# EAGLE board Panelized-1 (EAGLE 5.10)
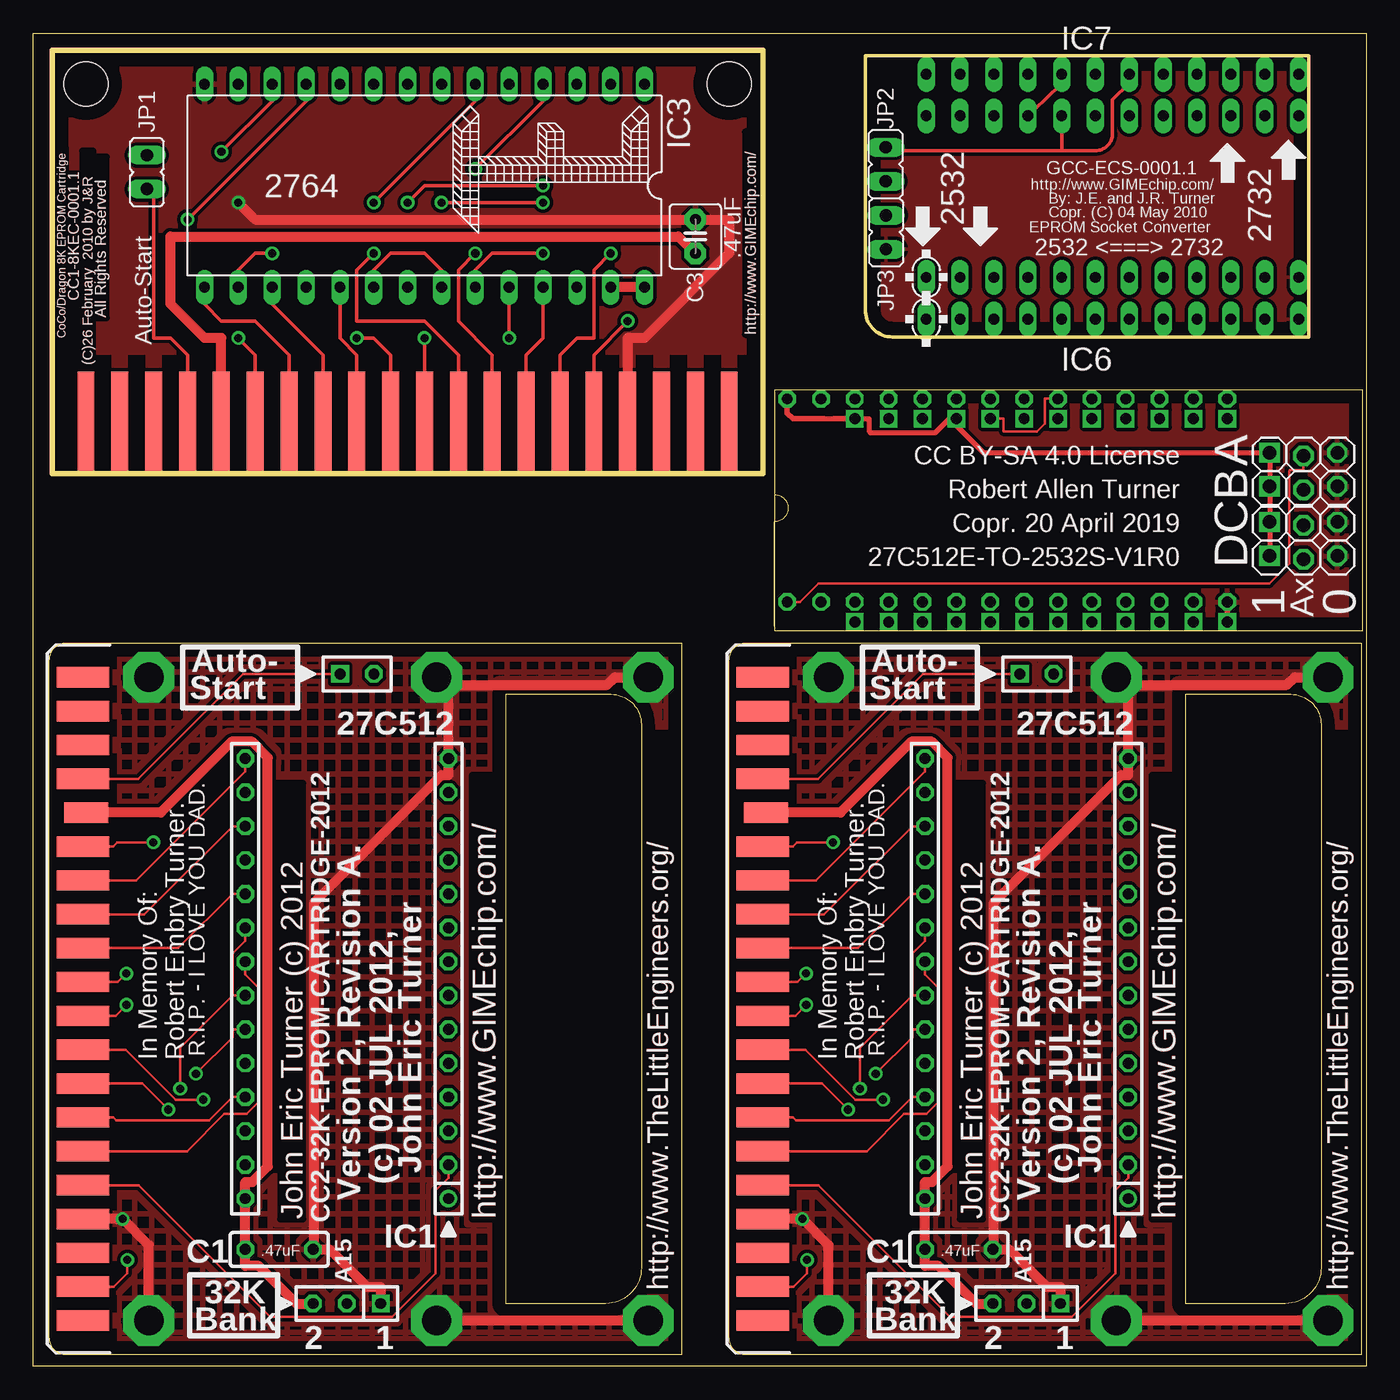
[diagram p0: board, top side]
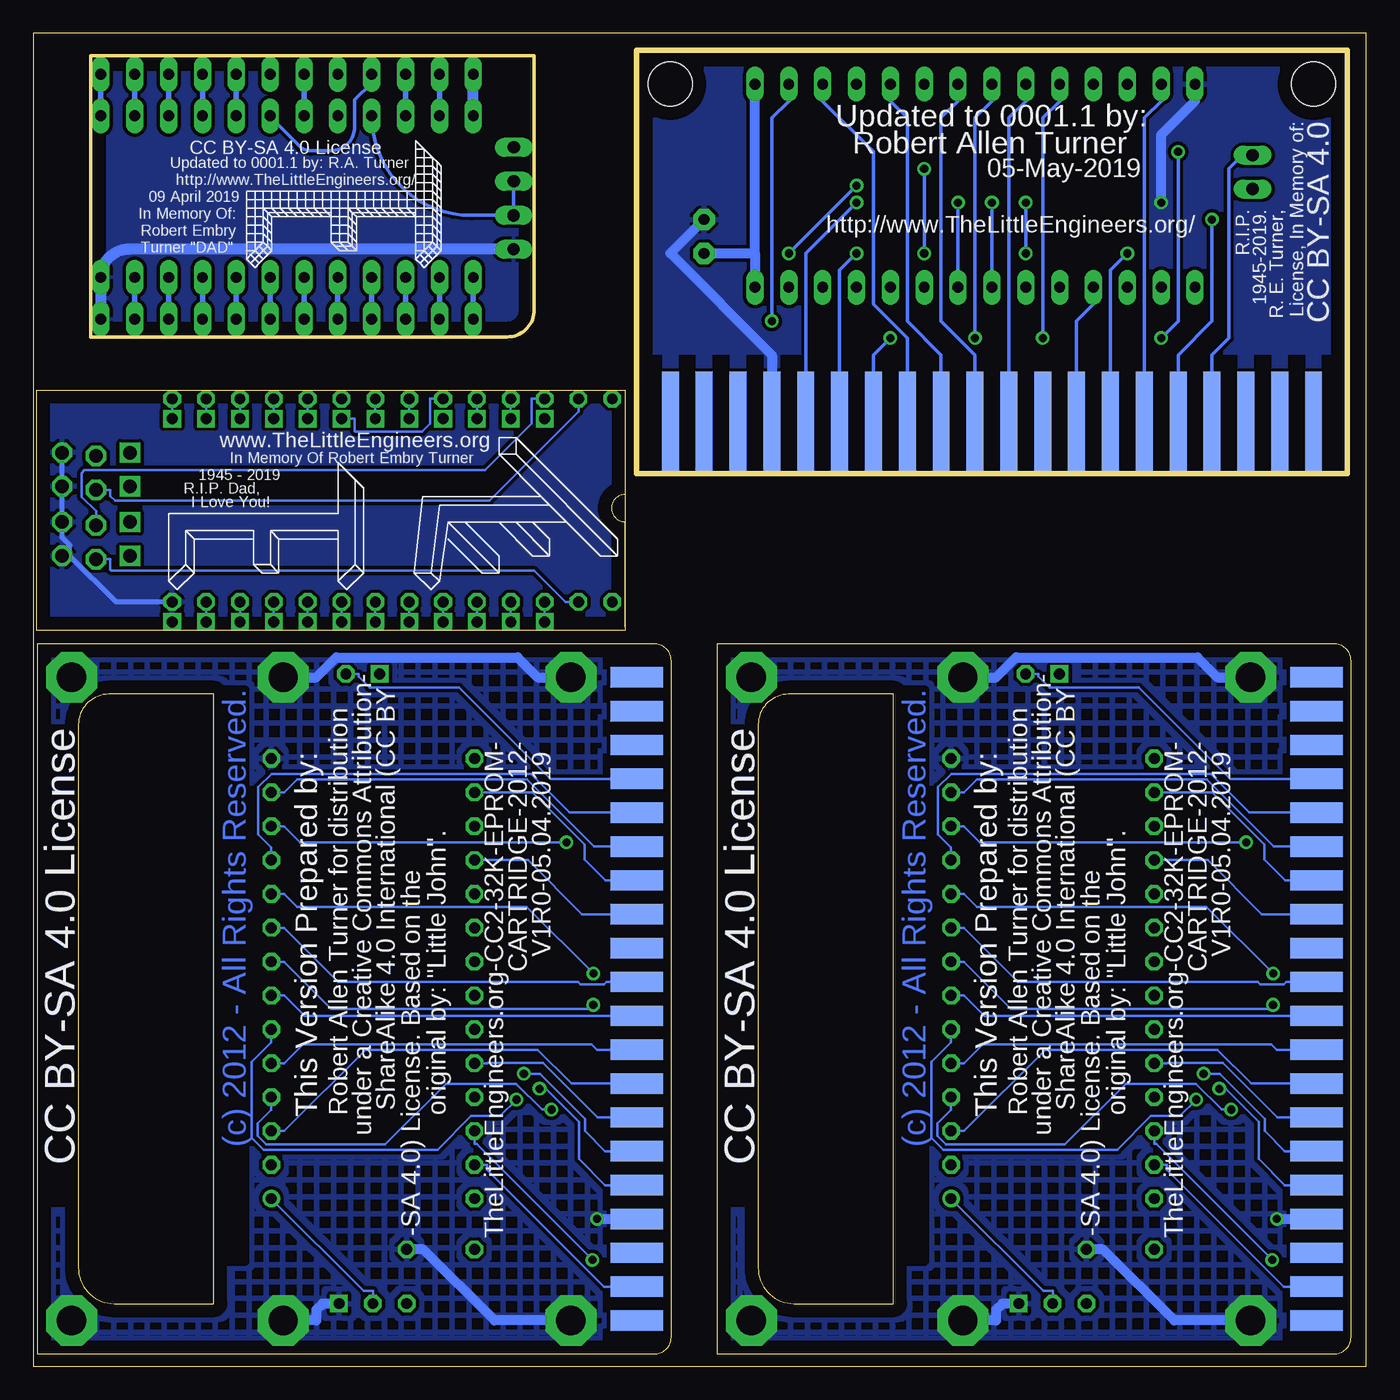
[diagram p1: board, bottom side, seen from below]

Size 100 x 100 mm. Coordinates in mm from the lower left corner, seen from the top.
Outline: 0,0 0,100 100,100 100,0 0,0
Outline: 48.67,0.89 48.67,54.23 2.44,54.23 arc90 1.17,52.96 1.17,2.16 arc90 2.44,0.89 48.67,0.89
Outline: 35.46,50.42 43.33,50.42 arc-90 45.62,48.13 45.62,7.39 arc-90 42.93,4.7 35.46,4.7 35.46,50.42
Outline: 99.67,0.89 99.67,54.23 53.44,54.23 arc90 52.17,52.96 52.17,2.16 arc90 53.44,0.89 99.67,0.89
Outline: 86.46,50.42 94.33,50.42 arc-90 96.62,48.13 96.62,7.39 arc-90 93.93,4.7 86.46,4.7 86.46,50.42
Outline: 1.41,66.98 54.75,66.98 54.75,98.73 1.41,98.73 1.41,66.98
Outline: 55.62,73.22 55.62,55.21 99.74,55.21 99.74,73.22 55.62,73.22
Outline: 62.42,98.3 95.69,98.3 95.69,77.22 64.45,77.22 arc-90 62.42,79.25 62.42,98.3
Copper layers (1*16): Top 0.035mm / dielectric 1.5mm / Bottom 0.035mm
Design rules "default": minimum track width 10mil, minimum drill 24mil, track to track 8mil, track to pad 8mil, pad to pad 8mil, via to via 8mil, smd to smd 8mil, copper to edge 40mil, drill to drill 8mil, minimum pad ring 10mil, minimum via ring 8mil, stop-mask expansion 4mil, vias tented up to drill 0mil, thermal gap 10mil
Net classes: 0 default: width 0.203 mm, clearance 0.203 mm; 1 power: width 0.762 mm, clearance 0.254 mm
vRestrict: area 16.4,9.8 to 30.4,50.4; area 67.4,9.8 to 81.4,50.4

## Footprints (pad centres in the part's own frame; a part is rotated, then mirrored left to right if it is on the bottom)
HEADER-1X03-STAGGERED = drill 1.016 square: 1 -2.54,0.127 | drill 1.016 octagon: 2 0,-0.127; 3 2.54,0.127
C050-025X075 = drill 0.813 octagon: 1 -2.54,0; 2 2.54,0
C2.5-4 = drill 0.813 pad 1.6 octagon: 1 -1.27,0; 2 1.27,0
SIL1X02-100 = drill 0.813 square: 1 -1.27,0 | drill 0.813 octagon: 2 1.27,0
SIL1X03-100 = drill 0.813 square: 1 -2.54,0 | drill 0.813 octagon: 2 0,0; 3 2.54,0
EDGE-CARD-PLUG-2X20-100-SHORT = smd 3.937 x 1.524: 1 3.81,24.13; 3 3.81,21.59; 5 3.81,19.05; 7 3.81,16.51; 11 3.81,11.43; 13 3.81,8.89; 15 3.81,6.35; 17 3.81,3.81; 19 3.81,1.27; 21 3.81,-1.27; 23 3.81,-3.81; 25 3.81,-6.35; 27 3.81,-8.89; 29 3.81,-11.43; 31 3.81,-13.97; 33 3.81,-16.51; 35 3.81,-19.05; 37 3.81,-21.59; 39 3.81,-24.13 | smd 3.937 x 1.524 bottom: 2 3.81,24.13; 4 3.81,21.59; 6 3.81,19.05; 8 3.81,16.51; 10 3.81,13.97; 12 3.81,11.43; 14 3.81,8.89; 16 3.81,6.35; 18 3.81,3.81; 20 3.81,1.27; 22 3.81,-1.27; 24 3.81,-3.81; 26 3.81,-6.35; 28 3.81,-8.89; 30 3.81,-11.43; 32 3.81,-13.97; 34 3.81,-16.51; 36 3.81,-19.05; 38 3.81,-21.59; 40 3.81,-24.13 | smd 3.302 x 1.524: 9 4.064,13.97
COCO_EDGECARD40 = smd 7.62 x 1.27: 5V 0,13.97; -12V 0,24.13; A0 0,1.27; A2 0,-1.27; A4 0,-3.81; A6 0,-6.35; A8 0,-8.89; A10 0,-11.43; A12 0,-13.97; A13 0,-21.59; A15 0,-24.13; D1 0,11.43; D3 0,8.89; D5 0,6.35; D7 0,3.81; GND1 0,-16.51; HALT* 0,21.59; Q 0,16.51; RESET* 0,19.05; SND 0,-19.05 | smd 7.62 x 1.27 bottom: 12V 0,24.13; A1 0,1.27; A3 0,-1.27; A5 0,-3.81; A7 0,-6.35; A9 0,-8.89; A11 0,-11.43; A14 0,-21.59; CART* 0,16.51; CTS* 0,-13.97; D0 0,13.97; D2 0,11.43; D4 0,8.89; D6 0,6.35; E 0,19.05; GND2 0,-16.51; NMI* 0,21.59; R/W* 0,3.81; SCS* 0,-19.05; SLENB* 0,-24.13
STAND-OFF = drill 2.2 pad 3.81 octagon: GND 0,0
DIL28-6-MINIMAL-OUTLINE = drill 0.813 round: 1 -16.51,-7.62 | drill 0.813 octagon: 2 -13.97,-7.62; 3 -11.43,-7.62; 4 -8.89,-7.62; 5 -6.35,-7.62; 6 -3.81,-7.62; 7 -1.27,-7.62; 8 1.27,-7.62; 9 3.81,-7.62; 10 6.35,-7.62; 11 8.89,-7.62; 12 11.43,-7.62; 13 13.97,-7.62; 14 16.51,-7.62; 15 16.51,7.62; 16 13.97,7.62; 17 11.43,7.62; 18 8.89,7.62; 19 6.35,7.62; 20 3.81,7.62; 21 1.27,7.62; 22 -1.27,7.62; 23 -3.81,7.62; 24 -6.35,7.62; 25 -8.89,7.62; 26 -11.43,7.62; 27 -13.97,7.62; 28 -16.51,7.62
DIL28 = drill 0.813 long: 1 -16.51,-7.62; 2 -13.97,-7.62; 3 -11.43,-7.62; 4 -8.89,-7.62; 5 -6.35,-7.62; 6 -3.81,-7.62; 7 -1.27,-7.62; 8 1.27,-7.62; 9 3.81,-7.62; 10 6.35,-7.62; 11 8.89,-7.62; 12 11.43,-7.62; 13 13.97,-7.62; 14 16.51,-7.62; 15 16.51,7.62; 16 13.97,7.62; 17 11.43,7.62; 18 8.89,7.62; 19 6.35,7.62; 20 3.81,7.62; 21 1.27,7.62; 22 -1.27,7.62; 23 -3.81,7.62; 24 -6.35,7.62; 25 -8.89,7.62; 26 -11.43,7.62; 27 -13.97,7.62; 28 -16.51,7.62
DIL24-6-NO-OUTLINE = drill 0.813 square: 1 -13.97,-7.62; 2 -11.43,-7.62; 3 -8.89,-7.62; 4 -6.35,-7.62; 5 -3.81,-7.62; 6 -1.27,-7.62; 7 1.27,-7.62; 8 3.81,-7.62; 9 6.35,-7.62; 10 8.89,-7.62; 11 11.43,-7.62; 12 13.97,-7.62; 13 13.97,7.62; 14 11.43,7.62; 15 8.89,7.62; 16 6.35,7.62; 17 3.81,7.62; 18 1.27,7.62; 19 -1.27,7.62; 20 -3.81,7.62; 21 -6.35,7.62; 22 -8.89,7.62; 23 -11.43,7.62; 24 -13.97,7.62
DIL28-6-NO-OUTLINE = drill 0.813 octagon: 1 -16.51,-7.62; 2 -13.97,-7.62; 3 -11.43,-7.62; 4 -8.89,-7.62; 5 -6.35,-7.62; 6 -3.81,-7.62; 7 -1.27,-7.62; 8 1.27,-7.62; 9 3.81,-7.62; 10 6.35,-7.62; 11 8.89,-7.62; 12 11.43,-7.62; 13 13.97,-7.62; 14 16.51,-7.62; 15 16.51,7.62; 16 13.97,7.62; 17 11.43,7.62; 18 8.89,7.62; 19 6.35,7.62; 20 3.81,7.62; 21 1.27,7.62; 22 -1.27,7.62; 23 -3.81,7.62; 24 -6.35,7.62; 25 -8.89,7.62; 26 -11.43,7.62; 27 -13.97,7.62; 28 -16.51,7.62
DIL24 = drill 0.813 long: 1 -13.97,-7.62; 2 -11.43,-7.62; 3 -8.89,-7.62; 4 -6.35,-7.62; 5 -3.81,-7.62; 6 -1.27,-7.62; 7 1.27,-7.62; 8 3.81,-7.62; 9 6.35,-7.62; 10 8.89,-7.62; 11 11.43,-7.62; 12 13.97,-7.62; 13 13.97,7.62; 14 11.43,7.62; 15 8.89,7.62; 16 6.35,7.62; 17 3.81,7.62; 18 1.27,7.62; 19 -1.27,7.62; 20 -3.81,7.62; 21 -6.35,7.62; 22 -8.89,7.62; 23 -11.43,7.62; 24 -13.97,7.62
JP1 = drill 0.914 long: 1 0,-1.27; 2 0,1.27
SPARKFUN_STAND-OFF = hole 3.302: 0,0

## Placement (x,y rotation side)
A1  [HEADER-1X03-STAGGERED]  95.29,60.67 0 top
A2  [HEADER-1X03-STAGGERED]  95.29,63.21 0 top
A3  [HEADER-1X03-STAGGERED]  95.29,65.88 0 top
A4  [HEADER-1X03-STAGGERED]  95.29,68.42 0 top
C1  .47uF  [C050-025X075]  18.44,8.76 0 top
C2  .47uF  [C050-025X075]  69.44,8.76 0 top
C3  .47uF  [C2.5-4]  49.67,84.76 90 top
CN1  1X02-SIP-100-32  [SIL1X02-100]  75.29,51.94 0 top
CN2  1X02-SIP-100-32  [SIL1X02-100]  24.29,51.94 0 top
CN3  1X03-SIP-100-32  [SIL1X03-100]  23.52,4.7 180 top
CN4  [EDGE-CARD-PLUG-2X20-100-SHORT]  -0.1,27.56 0 top
CN5  1X03-SIP-100-32  [SIL1X03-100]  74.52,4.7 180 top
CN6  [EDGE-CARD-PLUG-2X20-100-SHORT]  50.9,27.56 0 top
CN7  COCO_PROGRAM_PAK  [COCO_EDGECARD40]  28.08,70.79 90 top
GND1  GROUNDING-STAND-OFF  [STAND-OFF]  46.13,51.69 0 top
GND2  GROUNDING-STAND-OFF  [STAND-OFF]  46.13,3.43 0 top
GND3  GROUNDING-STAND-OFF  [STAND-OFF]  30.25,51.69 0 top
GND4  GROUNDING-STAND-OFF  [STAND-OFF]  8.66,51.69 0 top
GND5  GROUNDING-STAND-OFF  [STAND-OFF]  30.25,3.43 0 top
GND6  GROUNDING-STAND-OFF  [STAND-OFF]  8.66,3.43 0 top
GND7  GROUNDING-STAND-OFF  [STAND-OFF]  97.13,51.69 0 top
GND8  GROUNDING-STAND-OFF  [STAND-OFF]  97.13,3.43 0 top
GND9  GROUNDING-STAND-OFF  [STAND-OFF]  81.25,51.69 0 top
GND10  GROUNDING-STAND-OFF  [STAND-OFF]  59.66,51.69 0 top
GND11  GROUNDING-STAND-OFF  [STAND-OFF]  81.25,3.43 0 top
GND12  GROUNDING-STAND-OFF  [STAND-OFF]  59.66,3.43 0 top
IC1  [DIL28-6-MINIMAL-OUTLINE]  23.52,29.08 90 top
IC2  [DIL28-6-MINIMAL-OUTLINE]  74.52,29.08 90 top
IC3  2764  [DIL28]  29.35,88.57 180 top
IC4  [DIL24-6-NO-OUTLINE]  75.61,63.46 0 top
IC5  [DIL28-6-NO-OUTLINE]  73.07,64.96 0 top
IC6  2532  [DIL24]  80.96,86.19 0 top
IC7  2732  [DIL24]  80.96,89.31 0 top
JP1  Auto-Start  [JP1]  8.52,89.59 180 top
JP2  [JP1]  63.94,90.18 0 top
JP3  [JP1]  63.97,85.07 0 top
U$1  [TLE-LOGO-9]  46.11,85.02 90 top
U$2  SPARKFUN_STAND-OFF  [SPARKFUN_STAND-OFF]  3.95,96.19 90 top
U$3  SPARKFUN_STAND-OFF  [SPARKFUN_STAND-OFF]  52.21,96.19 90 top
U$4  [OUTLINE]  56.89,55.49 90 top
U$5  [TLE-LOGO-I]  70.78,65.24 270 bottom
U$6  [TLE-LOGO-F]  89.83,63.97 270 bottom
U$7  [ARROW-L]  66.74,85.35 90 top
U$8  [ARROW-L]  71.06,85.35 90 top
U$9  [ARROW-R]  94.17,90.68 90 top
U$10  [ARROW-R]  89.6,90.43 90 top
U$11  [TLE-LOGO]  84.01,91.95 270 bottom

## Library data of the parts
A1-A4 IC4 IC5 U$4 = 27C512E-TO-2532S-V1R0.20.APRIL.2019-JOHN.ROESNER
C1 C2 = GIMEchip-Capacitor
C3 = capacitor-wima
CN1-CN3 CN5 = GIMEchip-Header-Generic
CN4 CN6 = GIMEchip-TRS-80-CoCo-3-Program-Pak-Cartridge
CN7 = CoCo
GND1-GND12 = GIMEchip-Grounding
IC1 IC2 = GIMEchip-EPROM
IC3 = memory
IC6 IC7 JP2 JP3 U$7-U$11 = GCC-ECS-0001.1
JP1 = jumper
U$1 = TLE_LOGOS
U$2 U$3 = FDC
U$5 U$6 = TheLittleEngineers.org-27C512E-TO-2532S-V1R0.20.APRIL.2019

## Nets
!CE: IC4.20 IC5.20 IC5.22
A0: IC4.8 IC5.10
A1: IC4.7 IC5.9
A2: IC4.6 IC5.8
A3: IC4.5 IC5.7
A4: IC4.4 IC5.6
A5: IC4.3 IC5.5
A6: IC4.2 IC5.4
A7: IC4.1 IC5.3
A8: IC4.23 IC5.25
A9: IC4.22 IC5.24
A10: IC4.19 IC5.21
A11: IC4.18 IC5.23
A12: A1.2 IC5.2
A13: A2.2 IC5.26
A14: A3.2 IC5.27
A15: A4.2 IC5.1
D0: CN7.D0 IC3.11
D1: CN7.D1 IC3.12
D2: CN7.D2 IC3.13
D3: CN7.D3 IC3.15
D4: CN7.D4 IC3.16
D5: CN7.D5 IC3.17
D6: CN7.D6 IC3.18
D7: CN7.D7 IC3.19
D8: IC4.9 IC5.11
D9: IC4.10 IC5.12
D10: IC4.11 IC5.13
D11: IC4.13 IC5.15
D12: IC4.14 IC5.16
D13: IC4.15 IC5.17
D14: IC4.16 IC5.18
D15: IC4.17 IC5.19
GND [power]: C1.2 CN3.1 CN4.33 CN4.34 GND1.GND GND2.GND GND3.GND GND4.GND GND5.GND GND6.GND IC1.14
GND1 [power]: C2.2 CN5.1 CN6.33 CN6.34 GND7.GND GND8.GND GND9.GND GND10.GND GND11.GND GND12.GND IC2.14
GND2 [power]: C3.2 CN7.GND1 CN7.GND2 IC3.14
GND3 [power]: A1.3 A2.3 A3.3 A4.3 IC4.12 IC5.14
GND4 [power]: IC6.12 IC7.12 JP3.1
N$1: CN1.1 CN6.7
N$2: CN2.1 CN4.7
N$3: CN2.2 CN4.8
N$4: CN4.19 IC1.10
N$5: CN4.20 IC1.9
N$6: CN4.21 IC1.8
N$7: CN4.22 IC1.7
N$8: CN4.23 IC1.6
N$9: CN4.24 IC1.5
N$10: CN4.25 IC1.4
N$11: CN4.26 IC1.3
N$12: CN4.27 IC1.25
N$13: CN4.28 IC1.24
N$14: CN4.29 IC1.21
N$15: CN4.30 IC1.23
N$16: CN4.31 IC1.2
N$17: CN4.37 IC1.26
N$18: CN4.38 IC1.27
N$19: CN3.2 IC1.1
N$20: CN1.2 CN6.8
N$21: CN4.10 IC1.11
N$22: CN4.11 IC1.12
N$23: CN4.12 IC1.13
N$24: CN4.13 IC1.15
N$25: CN4.14 IC1.16
N$26: CN4.15 IC1.17
N$27: CN4.16 IC1.18
N$28: CN4.17 IC1.19
N$29: CN4.32 IC1.20 IC1.22
N$30: CN6.19 IC2.10
N$31: CN6.20 IC2.9
N$32: CN6.21 IC2.8
N$33: CN6.22 IC2.7
N$34: CN6.23 IC2.6
N$35: CN6.24 IC2.5
N$36: CN6.25 IC2.4
N$37: CN6.26 IC2.3
N$38: CN6.27 IC2.25
N$39: CN6.28 IC2.24
N$40: CN6.29 IC2.21
N$41: CN6.30 IC2.23
N$42: CN6.31 IC2.2
N$43: CN6.37 IC2.26
N$44: CN6.38 IC2.27
N$45: CN5.2 IC2.1
N$46: CN6.10 IC2.11
N$47: CN6.11 IC2.12
N$48: CN6.12 IC2.13
N$49: CN6.13 IC2.15
N$50: CN6.14 IC2.16
N$51: CN6.15 IC2.17
N$52: CN6.16 IC2.18
N$53: CN6.17 IC2.19
N$54: CN6.32 IC2.20 IC2.22
N$55: CN7.A0 IC3.10
N$56: CN7.A1 IC3.9
N$57: CN7.A2 IC3.8
N$58: CN7.A3 IC3.7
N$59: CN7.A4 IC3.6
N$60: CN7.A5 IC3.5
N$61: CN7.A6 IC3.4
N$62: CN7.A7 IC3.3
N$63: CN7.A8 IC3.25
N$64: CN7.A9 IC3.24
N$65: CN7.A10 IC3.21
N$66: CN7.A11 IC3.23
N$67: CN7.A12 IC3.2
N$68: CN7.CTS* IC3.20 IC3.22
N$69: CN7.Q JP1.2
N$70: CN7.CART* JP1.1
N$71: IC6.8 IC7.8
N$72: IC6.7 IC7.7
N$73: IC6.6 IC7.6
N$74: IC6.5 IC7.5
N$75: IC6.4 IC7.4
N$76: IC6.3 IC7.3
N$77: IC6.2 IC7.2
N$78: IC6.1 IC7.1
N$79: IC6.23 IC7.23
N$80: IC6.22 IC7.22
N$81: IC6.19 IC7.19
N$82: IC6.18 IC7.21
N$83: IC6.20 IC7.18 JP2.2
N$84: IC6.21 IC7.20 JP2.1 JP3.2
N$85: IC6.9 IC7.9
N$86: IC6.10 IC7.10
N$87: IC6.11 IC7.11
N$88: IC6.13 IC7.13
N$89: IC6.14 IC7.14
N$90: IC6.15 IC7.15
N$91: IC6.16 IC7.16
N$92: IC6.17 IC7.17
VCC [power]: C1.1 CN3.3 CN4.9 IC1.28
VCC1 [power]: C2.1 CN5.3 CN6.9 IC2.28
VCC2 [power]: C3.1 CN7.5V IC3.1 IC3.27 IC3.28
VCC3 [power]: A1.1 A2.1 A3.1 A4.1 IC4.21 IC4.24 IC5.28
VCC4 [power]: IC6.24 IC7.24

## Tracks (layer width: path | path; a pad name or v marks a point on that pad's centre or on a via)
!CE
  Top 0.203: IC4.20 72.77,71.08 72.77,70.17 72.82,70.11 75.3,70.11 75.91,70.73 75.91,72.58 IC5.20
  Bottom 0.203: IC4.20 IC5.22
A0
  Bottom 0.203: IC4.8 IC5.10
A1
  Bottom 0.203: IC4.7 IC5.9
A2
  Bottom 0.203: IC4.6 IC5.8
A3
  Bottom 0.203: IC4.5 IC5.7
A4
  Bottom 0.203: IC4.4 IC5.6
A5
  Bottom 0.203: IC4.3 IC5.5
A6
  Bottom 0.203: IC4.2 IC5.4
A7
  Bottom 0.203: IC4.1 IC5.3
A8
  Bottom 0.203: IC4.23 IC5.25
A9
  Bottom 0.203: IC4.22 IC5.24
A10
  Bottom 0.203: IC4.19 IC5.21
A11
  Bottom 0.203: IC4.18 75.91,71.08 75.91,70.17 75.85,70.11 70.84,70.11 70.23,70.73 70.23,72.58 IC5.23
A12
  Bottom 0.203: A1.2 94.22,60.54 94.22,59.75 94.17,59.7 62.42,59.7 60.07,57.34 IC5.2
A13
  Bottom 0.203: A2.2 95.29,64.15 96.36,65.22 96.36,67.02 96.17,67.22 66.12,67.22 62.61,70.73 62.61,72.58 IC5.26
A14
  Bottom 0.203: A3.2 94.22,65.75 94.22,65.3 93.86,64.93 65.78,64.93 59.1,71.61 IC5.27
A15
  Top 0.203: A4.2 95.29,67.22 94.28,67.22 94.22,67.16 94.22,60.2 92.74,58.72 58.9,58.72 57.53,57.34 IC5.1
D0  (via drill 0.61)
  Top 0.254: v11.57,86.03 20.46,94.92 IC3.11
  Bottom 0.254: v11.57,86.03 11.57,78.41 14.11,75.87 CN7.D0
D1  (via drill 0.61)
  Top 0.254: v14.11,91.11 17.92,94.92 IC3.12 | v15.38,77.14 16.65,75.87 CN7.D1
  Bottom 0.254: v14.11,91.11 14.11,78.41 v15.38,77.14
D2
  Bottom 0.254: IC3.13 15.38,94.92 16.65,93.65 CN7.D2
D3
  Top 0.254: IC3.15 12.84,79.68 14.11,78.41 16.65,78.41 19.19,75.87 CN7.D3
D4  (via drill 0.61)
  Top 0.254: v17.92,83.49 16.65,83.49 15.38,82.22 IC3.16
  Bottom 0.254: v17.92,83.49 19.19,82.22 CN7.D4
D5
  Top 0.254: IC3.17 17.92,79.68 21.73,75.87 CN7.D5
D6
  Bottom 0.254: IC3.18 20.46,79.68 21.73,78.41 CN7.D6
D7
  Top 0.254: IC3.19 23,77.14 24.27,75.87 CN7.D7
D8
  Bottom 0.203: IC4.9 IC5.11
D9
  Bottom 0.203: IC4.10 IC5.12
D10
  Bottom 0.203: IC4.11 IC5.13
D11
  Bottom 0.203: IC4.13 IC5.15
D12
  Bottom 0.203: IC4.14 IC5.16
D13
  Bottom 0.203: IC4.15 IC5.17
D14
  Bottom 0.203: IC4.16 IC5.18
D15
  Bottom 0.203: IC4.17 IC5.19
GND  (via drill 0.61 pad 1.02)
  Top 0.762: GND5.GND GND2.GND | 21.08,8.76 21.08,34.8 30.63,44.34 31.14,44.34 IC1.14 31.14,46.84 31.14,51.11 | 21.08,8.76 22.23,8.76 25.05,5.94 26.06,5.94 CN3.1 | C1.2 21.08,8.76 | 31.14,51.11 43.06,51.11 43.64,51.69 GND1.GND | GND3.GND 30.83,51.11 31.14,51.11 | CN4.34 6.26,11.05 v6.7,11.05 8.66,9.08 GND6.GND
  Bottom 0.762: GND3.GND 27.77,51.69 26.27,53.19 12.65,53.19 11.15,51.69 GND4.GND | v6.7,11.05 CN4.34 | GND5.GND 27.77,3.43 27.77,4.24 27.31,4.7 CN3.1 | C1.2 19.74,8.76 14.4,3.43 GND6.GND
  pour Top (hatched): 0.66,54.23 48.67,54.23 48.67,0.89 0.66,0.89
  pour Bottom (hatched): 0.66,54.23 48.67,54.23 48.67,0.89 0.66,0.89
GND1  (via drill 0.61 pad 1.02)
  Top 0.762: GND11.GND GND8.GND | 72.08,8.76 72.08,34.8 81.63,44.34 82.14,44.34 IC2.14 82.14,46.84 82.14,51.11 | 72.08,8.76 73.23,8.76 76.05,5.94 77.06,5.94 CN5.1 | C2.2 72.08,8.76 | 82.14,51.11 94.06,51.11 94.64,51.69 GND7.GND | GND9.GND 81.83,51.11 82.14,51.11 | CN6.34 57.27,11.05 v57.7,11.05 59.66,9.08 GND12.GND
  Bottom 0.762: GND9.GND 78.77,51.69 77.27,53.19 63.65,53.19 62.15,51.69 GND10.GND | v57.7,11.05 CN6.34 | GND11.GND 78.77,3.43 78.77,4.24 78.31,4.7 CN5.1 | C2.2 70.74,8.76 65.41,3.43 GND12.GND
  pour Top (hatched): 51.66,54.23 99.67,54.23 99.67,0.89 51.66,0.89
  pour Bottom (hatched): 51.66,54.23 99.67,54.23 99.67,0.89 51.66,0.89
GND2  (via drill 0.61)
  Top 0.762: v15.38,87.3 16.65,86.03 C3.2 52.21,86.03 52.21,83.49 45.86,77.14 44.59,77.14 CN7.GND2
  Bottom 0.762: v15.38,87.3 15.38,92.38 12.84,94.92 IC3.14 | C3.2 52.21,83.49 44.59,75.87 CN7.GND2
  pour Top: 1.41,66.98 1.41,98.73 54.75,98.73 54.75,66.98
  pour Bottom: 1.41,66.98 1.41,98.73 54.75,98.73 54.75,66.98
GND3
  Top 0.406: IC4.12 IC5.14
  Bottom 0.381: IC5.14 93.8,57.34 97.25,60.8 | A4.3 A3.3 A2.3 97.83,62.18 97.25,61.6 97.25,60.8 | 97.25,60.8 A1.3
  pour Bottom: 55.16,54.83 55.41,73.5 99.99,73.5 99.74,54.83
  pour Top: 55.29,54.83 55.29,73.62 100.12,73.62 100.12,54.83
GND4
  Bottom 0.813: IC6.12 IC7.12 arc90 92.82,83.8 JP3.1
  pour Bottom: 62.42,98.3 62.42,77.22 95.69,77.22 95.69,98.3
  pour Top: 62.42,98.3 62.42,77.22 95.69,77.22 95.69,98.3
N$1
  Top 0.203: CN6.7 58.86,44.07 66.74,51.94 CN1.1
N$2
  Top 0.203: CN4.7 7.86,44.07 15.74,51.94 CN2.1
N$3
  Bottom 0.203: CN4.8 10.21,44.07 17.06,50.91 23.76,50.91 24.59,51.74 24.59,51.94 CN2.2
N$4  (via drill 0.61 pad 1.02)
  Top 0.203: CN4.19 6.35,28.83 v6.98,29.46
  Bottom 0.203: v6.98,29.46 11.98,34.47 29.21,34.47 30.18,35.43 IC1.10
N$5
  Bottom 0.203: CN4.20 5.99,28.83 6.17,28.65 7.95,28.65 8.13,28.83 26.11,28.83 30.18,32.89 IC1.9
N$6  (via drill 0.61 pad 1.02)
  Top 0.203: CN4.21 6.17,26.29 v6.99,27.11
  Bottom 0.203: IC1.8 30.18,30.35 26.65,26.82 7.27,26.82 v6.99,27.11
N$7
  Bottom 0.203: IC1.7 30.18,27.81 28.66,26.29 CN4.22
N$8  (via drill 0.61 pad 1.02)
  Top 0.203: v12.75,20 10.69,20 6.94,23.75 CN4.23
  Bottom 0.203: IC1.6 31.14,24.3 32.6,22.85 32.6,17.12 31.72,16.24 18.68,16.24 16.14,18.78 13.97,18.78 v12.75,20
N$9
  Bottom 0.203: IC1.5 30.18,22.73 28.75,24.16 7.12,24.16 6.71,23.75 CN4.24
N$10  (via drill 0.61 pad 1.02)
  Top 0.203: CN4.25 8.17,21.21 v10.13,19.25
  Bottom 0.203: IC1.4 31.14,19.23 32.15,18.21 32.15,17.27 31.53,16.64 22.59,16.64 18.04,21.2 12.77,21.2 10.83,19.25 v10.13,19.25
N$11
  Bottom 0.203: CN4.26 8.63,21.21 11.17,23.75 24.08,23.75 30.18,17.65 IC1.3
N$12
  Top 0.203: IC1.25 14.94,20.19 13.19,18.44 6.21,18.44 5.99,18.67 CN4.27
N$13
  Bottom 0.203: CN4.28 6.67,18.67 10.75,22.75 14.92,22.75 14.94,22.73 IC1.24
N$14
  Top 0.203: CN4.29 11.53,16.13 14.32,18.92 16,18.92 16.89,19.8 16.89,28.4 15.9,29.39 IC1.21
N$15  (via drill 0.61 pad 1.02)
  Top 0.203: IC1.23 14.94,25.27 14.94,24.68 v12.2,21.93
  Bottom 0.203: v12.2,21.93 10.99,21.93 7.62,18.57 7.62,17.64 6.11,16.13 CN4.30
N$16
  Top 0.203: IC1.2 31.14,14.14 30.18,13.18 30.18,6.99 26.91,3.72 17.76,3.72 7.89,13.59 CN4.31
N$17  (via drill 0.61 pad 1.02)
  Top 0.203: v7.05,7.98 7.05,6.97 6.05,5.97 CN4.37
  Bottom 0.203: IC1.26 15.9,16.68 15.76,16.68 v7.05,7.98
N$18
  Bottom 0.203: CN4.38 6.19,5.97 14.94,14.71 14.94,15.11 IC1.27
N$19
  Bottom 0.203: CN3.2 23.52,5.66 24.23,5.66 IC1.1
N$20
  Bottom 0.203: CN6.8 61.21,44.07 68.06,50.91 74.76,50.91 75.59,51.74 75.59,51.94 CN1.2
N$21
  Bottom 0.203: IC1.11 31.14,38.94 32.11,39.91 32.11,43.45 31.14,44.42 11.67,44.42 8.77,41.53 CN4.10
N$22  (via drill 0.61 pad 1.02)
  Top 0.203: v9,39.3 6.3,39.3 5.99,38.99 CN4.11
  Bottom 0.203: IC1.12 30.18,40.51 28.97,39.3 v9,39.3
N$23
  Bottom 0.203: CN4.12 6.92,38.99 11.95,44.02 29.21,44.02 30.18,43.05 IC1.13
N$24
  Top 0.203: IC1.15 15.9,44.62 7.72,36.45 CN4.13
N$25
  Bottom 0.203: 14.94,43.05 IC1.16 | CN4.14 6.06,36.45 7.64,38.03 7.64,39.14 11.56,43.05 14.94,43.05 | 14.94,43.05
N$26
  Top 0.203: IC1.17 14.94,40.51 8.34,33.91 CN4.15
N$27
  Bottom 0.203: IC1.18 11.89,37.97 7.82,33.91 CN4.16
N$28
  Top 0.203: IC1.19 14.94,35.43 10.88,31.37 CN4.17
N$29  (via drill 0.61 pad 1.02)
  Top 0.203: 14.94,27.81 14.94,30.96 15.9,31.93 IC1.20 | v11.02,20.82 11.02,23.89 14.94,27.81 | 14.94,27.81 IC1.22
  Bottom 0.203: v11.02,20.82 10.54,20.82 8.05,18.32 8.05,15.54 6.09,13.59 CN4.32
N$30  (via drill 0.61 pad 1.02)
  Top 0.203: CN6.19 57.35,28.83 v57.98,29.46
  Bottom 0.203: v57.98,29.46 62.98,34.47 80.21,34.47 81.18,35.43 IC2.10
N$31
  Bottom 0.203: CN6.20 56.98,28.83 57.17,28.65 58.95,28.65 59.13,28.83 77.11,28.83 81.18,32.89 IC2.9
N$32  (via drill 0.61 pad 1.02)
  Top 0.203: CN6.21 57.17,26.29 v57.99,27.11
  Bottom 0.203: IC2.8 81.18,30.35 77.65,26.82 58.27,26.82 v57.99,27.11
N$33
  Bottom 0.203: IC2.7 81.18,27.81 79.66,26.29 CN6.22
N$34  (via drill 0.61 pad 1.02)
  Top 0.203: v63.75,20 61.69,20 57.94,23.75 CN6.23
  Bottom 0.203: IC2.6 82.14,24.3 83.6,22.85 83.6,17.12 82.72,16.24 69.68,16.24 67.14,18.78 64.97,18.78 v63.75,20
N$35
  Bottom 0.203: IC2.5 81.18,22.73 79.75,24.16 58.12,24.16 57.71,23.75 CN6.24
N$36  (via drill 0.61 pad 1.02)
  Top 0.203: CN6.25 59.17,21.21 v61.13,19.25
  Bottom 0.203: IC2.4 82.14,19.23 83.15,18.21 83.15,17.27 82.53,16.64 73.59,16.64 69.04,21.2 63.77,21.2 61.83,19.25 v61.13,19.25
N$37
  Bottom 0.203: CN6.26 59.63,21.21 62.17,23.75 75.08,23.75 81.18,17.65 IC2.3
N$38
  Top 0.203: IC2.25 65.94,20.19 64.19,18.44 57.21,18.44 56.98,18.67 CN6.27
N$39
  Bottom 0.203: CN6.28 57.67,18.67 61.75,22.75 65.92,22.75 65.94,22.73 IC2.24
N$40
  Top 0.203: CN6.29 62.53,16.13 65.33,18.92 67,18.92 67.89,19.8 67.89,28.4 66.9,29.39 IC2.21
N$41  (via drill 0.61 pad 1.02)
  Top 0.203: IC2.23 65.94,25.27 65.94,24.68 v63.2,21.93
  Bottom 0.203: v63.2,21.93 61.99,21.93 58.62,18.57 58.62,17.64 57.11,16.13 CN6.30
N$42
  Top 0.203: IC2.2 82.14,14.14 81.18,13.18 81.18,6.99 77.91,3.72 68.76,3.72 58.89,13.59 CN6.31
N$43  (via drill 0.61 pad 1.02)
  Top 0.203: v58.05,7.98 58.05,6.97 57.05,5.97 CN6.37
  Bottom 0.203: IC2.26 66.9,16.68 66.76,16.68 v58.05,7.98
N$44
  Bottom 0.203: CN6.38 57.19,5.97 65.94,14.71 65.94,15.11 IC2.27
N$45
  Bottom 0.203: CN5.2 74.52,5.66 75.23,5.66 IC2.1
N$46
  Bottom 0.203: IC2.11 82.14,38.94 83.11,39.91 83.11,43.45 82.14,44.42 62.67,44.42 59.77,41.53 CN6.10
N$47  (via drill 0.61 pad 1.02)
  Top 0.203: v60,39.3 57.3,39.3 56.98,38.99 CN6.11
  Bottom 0.203: IC2.12 81.18,40.51 79.97,39.3 v60,39.3
N$48
  Bottom 0.203: CN6.12 57.92,38.99 62.95,44.02 80.21,44.02 81.18,43.05 IC2.13
N$49
  Top 0.203: IC2.15 66.9,44.62 58.73,36.45 CN6.13
N$50
  Bottom 0.203: 65.94,43.05 IC2.16 | CN6.14 57.06,36.45 58.65,38.03 58.65,39.14 62.56,43.05 65.94,43.05 | 65.94,43.05
N$51
  Top 0.203: IC2.17 65.94,40.51 59.34,33.91 CN6.15
N$52
  Bottom 0.203: IC2.18 62.89,37.97 58.82,33.91 CN6.16
N$53
  Top 0.203: IC2.19 65.94,35.43 61.88,31.37 CN6.17
N$54  (via drill 0.61 pad 1.02)
  Top 0.203: 65.94,27.81 65.94,30.96 66.9,31.93 IC2.20 | v62.02,20.82 62.02,23.89 65.94,27.81 | 65.94,27.81 IC2.22
  Bottom 0.203: v62.02,20.82 61.54,20.82 59.05,18.32 59.05,15.54 57.09,13.59 CN6.32
N$55  (via drill 0.61)
  Top 0.254: v24.27,77.14 25.54,77.14 26.81,75.87 CN7.A0
  Bottom 0.254: v24.27,77.14 24.27,93.65 23,94.92 IC3.10
N$56
  Bottom 0.254: IC3.9 25.54,94.92 26.81,93.65 CN7.A1
N$57  (via drill 0.61)
  Top 0.254: CN7.A2 v29.35,77.14
  Bottom 0.254: v29.35,77.14 29.35,93.65 28.08,94.92 IC3.8
N$58
  Bottom 0.254: IC3.7 30.62,94.92 31.89,93.65 31.89,78.41 29.35,75.87 CN7.A3
N$59  (via drill 0.61)
  Top 0.254: v25.54,87.3 33.16,94.92 IC3.6 | v25.54,83.49 24.27,82.22 24.27,78.41 29.35,78.41 31.89,75.87 CN7.A4
  Bottom 0.254: v25.54,83.49 v25.54,87.3
N$60
  Bottom 0.254: IC3.5 35.7,94.92 34.43,93.65 34.43,78.41 31.89,75.87 CN7.A5
N$61  (via drill 0.61)
  Top 0.254: v33.16,89.84 38.24,94.92 IC3.4 | v33.16,83.49 31.89,82.22 31.89,78.41 34.43,75.87 CN7.A6
  Bottom 0.254: v33.16,83.49 v33.16,89.84
N$62
  Bottom 0.254: IC3.3 40.78,94.92 36.97,91.11 36.97,79.68 34.43,77.14 CN7.A7
N$63
  Top 0.254: IC3.25 38.24,77.14 36.97,75.87 CN7.A8
N$64  (via drill 0.61)
  Top 0.254: v35.7,77.14 IC3.24
  Bottom 0.254: v35.7,77.14 36.97,75.87 CN7.A9
N$65  (via drill 0.61)
  Top 0.254: v28.08,87.3 29.35,88.57 v38.24,88.57 | v43.32,83.49 42.05,82.22 42.05,77.14 40.78,77.14 39.51,75.87 CN7.A10
  Bottom 0.254: v38.24,88.57 v43.32,83.49 | IC3.21 v28.08,87.3
N$66  (via drill 0.61)
  Top 0.254: v38.24,83.49 34.43,83.49 33.16,82.22 IC3.23
  Bottom 0.254: v38.24,83.49 39.51,82.22 CN7.A11
N$67  (via drill 0.61)
  Top 0.254: v44.59,78.41 42.05,75.87 CN7.A12
  Bottom 0.254: v44.59,78.41 44.59,93.65 43.32,94.92 IC3.2
N$68  (via drill 0.61)
  Top 0.254: IC3.22 30.62,82.22 29.35,83.49 26.81,83.49 25.54,82.22 IC3.20 | v30.62,87.3 v38.24,87.3
  Bottom 0.254: v38.24,87.3 42.05,83.49 CN7.CTS* | IC3.22 v30.62,87.3
N$69
  Top 0.254: JP1.2 9.03,88.57 9.03,77.14 10.3,77.14 11.57,75.87 CN7.Q
N$70
  Bottom 0.254: JP1.1 9.03,91.11 10.3,89.84 10.3,77.14 11.57,75.87 CN7.CART*
N$71
  Bottom 0.406: IC6.8 IC7.8
N$72
  Bottom 0.406: IC6.7 IC7.7
N$73
  Bottom 0.406: IC6.6 IC7.6
N$74
  Bottom 0.406: IC6.5 IC7.5
N$75
  Bottom 0.406: IC6.4 IC7.4
N$76
  Bottom 0.406: IC6.3 IC7.3
N$77
  Bottom 0.406: IC6.2 IC7.2
N$78
  Bottom 0.406: IC6.1 IC7.1
N$79
  Bottom 0.406: IC6.23 IC7.23
N$80
  Bottom 0.406: IC6.22 IC7.22
N$81
  Bottom 0.406: IC6.19 IC7.19
N$82
  Bottom 0.254: IC6.18 82.23,93.73 80.06,91.56 arc-45 79.17,91.19 77.68,91.19 arc-90 75.88,92.99 75.88,95 74.61,96.27 IC7.21
N$83
  Top 0.254: 77.15,91.19 64.45,91.19 JP2.2 | 77.15,91.19 79.69,91.19 arc90 80.96,92.46 80.96,95 82.23,96.27 IC7.18 | 77.15,91.19 IC6.20
N$84
  Top 0.254: IC7.20 77.15,96.27 75.88,95 IC6.21
  Bottom 0.254: 63.97,88.88 JP3.2 67.14,86.34 arc90 IC6.21
  Bottom 0.813: 63.97,88.88 arc90 JP2.1
N$85
  Bottom 0.406: IC6.9 IC7.9
N$86
  Bottom 0.406: IC6.10 IC7.10
N$87
  Bottom 0.406: IC6.11 IC7.11
N$88
  Bottom 0.406: IC6.13 IC7.13
N$89
  Bottom 0.406: IC6.14 IC7.14
N$90
  Bottom 0.406: IC6.15 IC7.15
N$91
  Bottom 0.406: IC6.16 IC7.16
N$92
  Bottom 0.406: IC6.17 IC7.17
VCC
  Top 0.762: CN4.9 9.57,41.53 14.9,46.85 16.41,46.85 17.59,45.67 17.59,14.98 16.42,13.81 15.9,13.81 IC1.28 C1.1 15.9,7.51 16.92,7.51 19.74,4.7 CN3.3
VCC1
  Top 0.762: CN6.9 60.57,41.53 65.89,46.85 67.41,46.85 68.59,45.67 68.59,14.98 67.42,13.81 66.9,13.81 IC2.28 C2.1 66.9,7.51 67.92,7.51 70.74,4.7 CN5.3
VCC2
  Top 0.762: IC3.28 IC3.27 | C3.1 48.4,84.76 10.3,84.76 10.3,79.68 12.84,77.14 14.11,77.14 CN7.5V
  Bottom 0.762: 45.86,83.49 IC3.1 | 45.86,83.49 IC3.28 | C3.1 45.86,83.49
VCC3
  Top 0.381: IC4.24 62.7,71.08 62.7,70.14 62.8,70.03 67.67,70.03 68.73,71.08 | 68.73,71.08 71.27,68.54 A4.1 92.75,67.16 A3.1 92.75,64.49 A2.1 92.75,61.95 A1.1 | 68.73,71.08 IC4.21 | 59.31,71.08 60.07,71.08
  Top 0.406: 60.07,71.08 IC4.24 | 59.31,71.08 56.99,71.08 56.56,71.51 IC5.28
VCC4
  Bottom 0.813: IC6.24 IC7.24

## Text on the board
Top: CC1-8KEC-0001.1 | All Rights Reserved | CoCo/Dragon 8K EPROM Cartridge | http://www.GIMEchip.com/ | (C)26 February 2010 by J&R | John Eric Turner (c) 2012 | http://www.GIMEchip.com/ | John Eric Turner (c) 2012 | http://www.GIMEchip.com/ | http://www.TheLittleEngineers.org/ | http://www.TheLittleEngineers.org/
Bottom: (c) 2012 - All Rights Reserved. | (c) 2012 - All Rights Reserved. | CC BY-SA 4.0 License | CC BY-SA 4.0 License
tPlace: CC1-8KEC-0001.1 | All Rights Reserved | CoCo/Dragon 8K EPROM Cartridge | http://www.GIMEchip.com/ | (C)26 February 2010 by J&R | CC BY-SA 4.0 License | A | Robert Allen Turner | B | Copr. 20 April 2019 | C | 27C512E-TO-2532S-V1R0 | D | 1 | Ax | 0 | In Memory Of: | Robert Embry Turner. | R.I.P. - I LOVE YOU DAD. | In Memory Of: | Robert Embry Turner. | R.I.P. - I LOVE YOU DAD.
bPlace: Updated to 0001.1 by: | CC BY-SA 4.0 | License, In Memory of: | Robert Allen Turner | CC BY-SA 4.0 License | 05-May-2019 | Updated to 0001.1 by: R.A. Turner | http://www.TheLittleEngineers.org/ | 09 April 2019 | R. E. Turner, | 1945-2019. | R.I.P. | In Memory Of: | http://www.TheLittleEngineers.org/ | Robert Embry | Turner "DAD" | www.TheLittleEngineers.org | In Memory Of Robert Embry Turner | 1945 - 2019 | R.I.P. Dad, | I Love You! | under a Creative Commons Attribution- | under a Creative Commons Attribution- | ShareAlike 4.0 International (CC BY | ShareAlike 4.0 International (CC BY | Robert Allen Turner for distribution | Robert Allen Turner for distribution | CC BY-SA 4.0 License | CC BY-SA 4.0 License | CARTRIDGE-2012- | TheLittleEngineers.org-CC2-32K-EPROM- | CARTRIDGE-2012- | TheLittleEngineers.org-CC2-32K-EPROM- | V1R0-05.04.2019 | This Version Prepared by: | V1R0-05.04.2019 | This Version Prepared by: | original by: "Little John". | original by: "Little John". | -SA 4.0) License. Based on the | -SA 4.0) License. Based on the
tNames: GCC-ECS-0001.1 | http://www.GIMEchip.com/ | By: J.E. and J.R. Turner | Copr. (C) 04 May 2010 | EPROM Socket Converter | 2532 <===> 2732 | Auto- | Auto- | Start | Start | 27C512 | 27C512 | John Eric Turner | John Eric Turner | (c) 02 JUL 2012, | (c) 02 JUL 2012, | Version 2, Revision A. | Version 2, Revision A. | John Eric Turner (c) 2012 | CC2-32K-EPROM-CARTRIDGE-2012 | http://www.GIMEchip.com/ | John Eric Turner (c) 2012 | CC2-32K-EPROM-CARTRIDGE-2012 | http://www.GIMEchip.com/ | IC1 | IC1 | C1 | C1 | A15 | http://www.TheLittleEngineers.org/ | A15 | http://www.TheLittleEngineers.org/ | 32K | 32K | Bank | Bank | 2 | 1 | 2 | 1